# EAGLE board ESPixel (EAGLE 7.2.0)
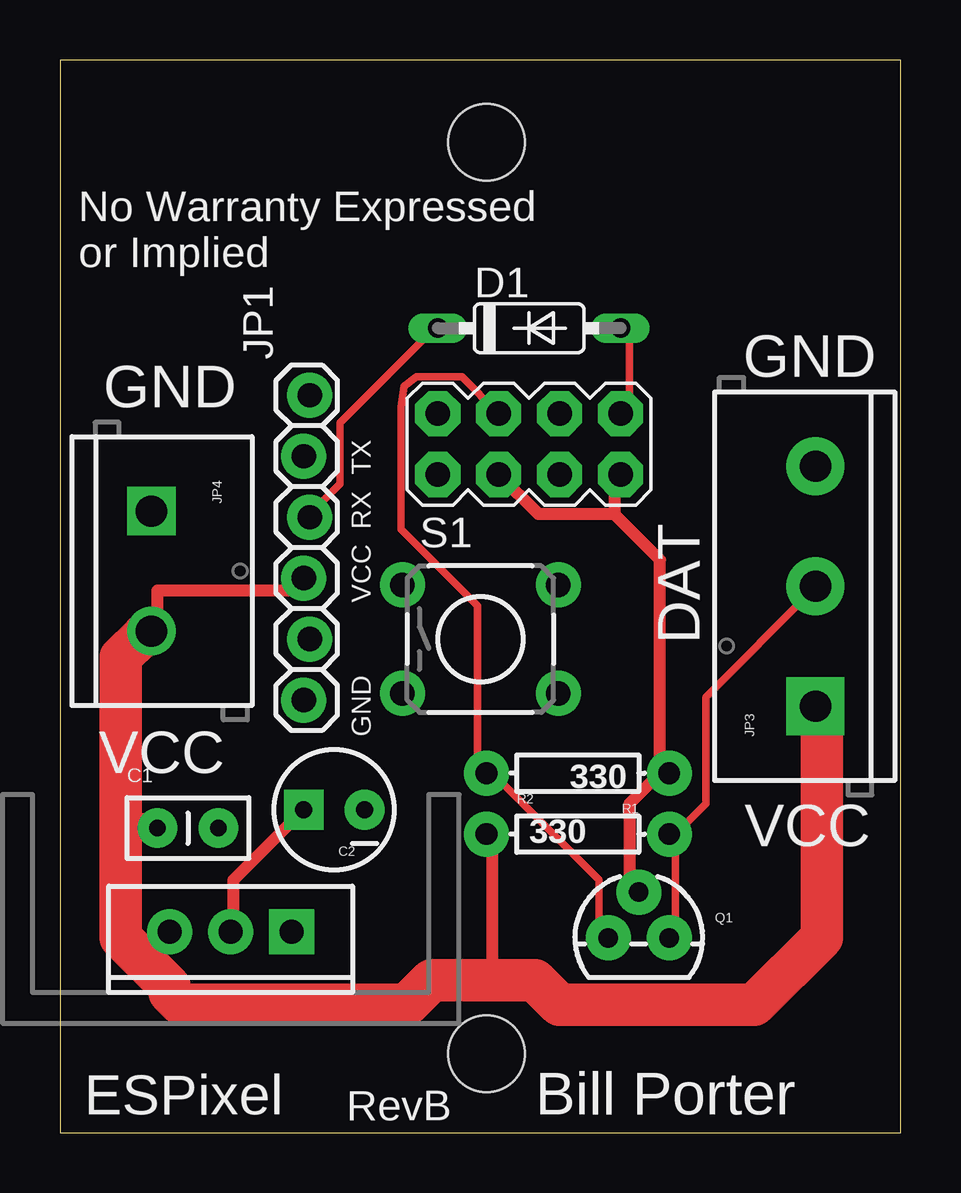
[diagram p0: board, top side]
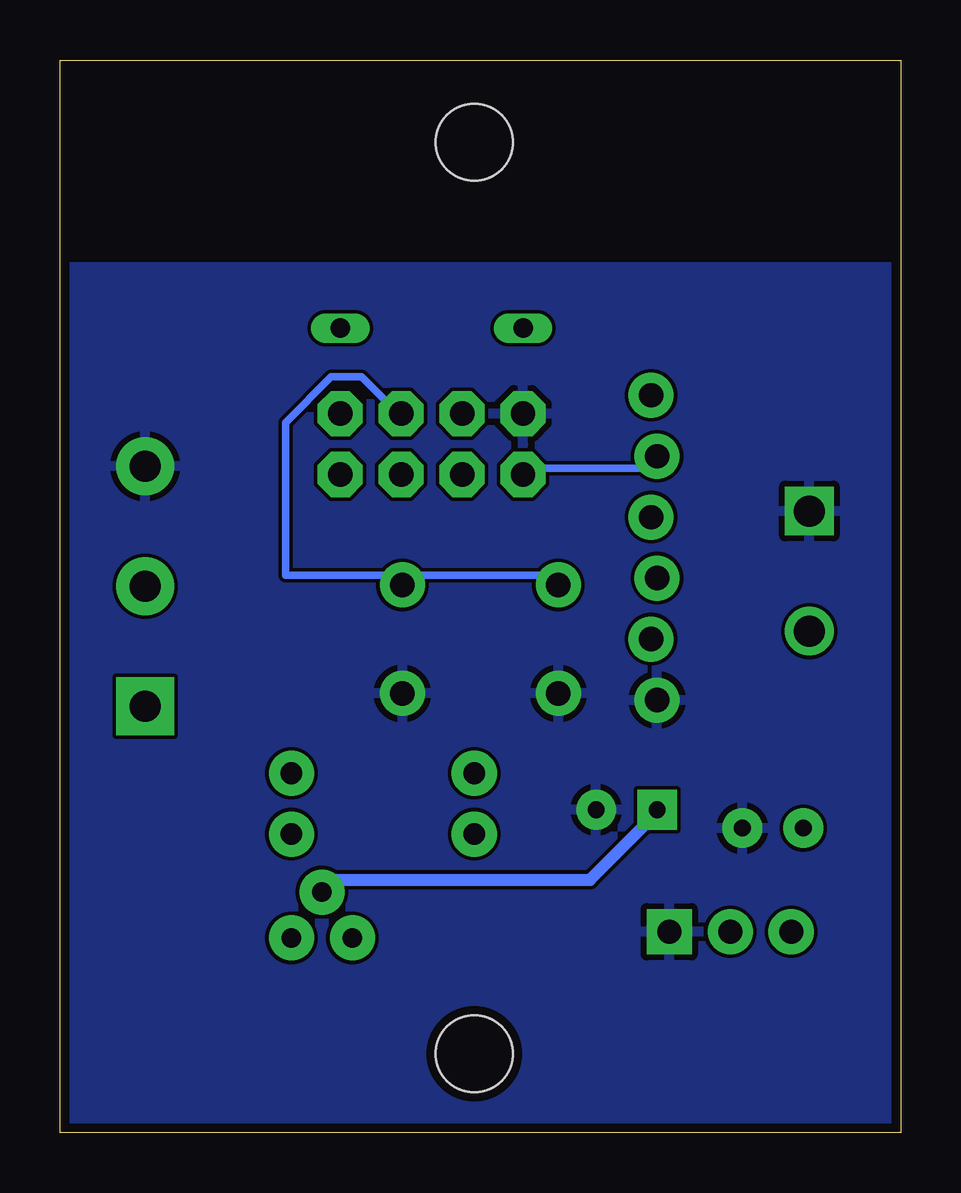
[diagram p1: board, bottom side, seen from below]

Size 35.05 x 44.7 mm. Coordinates in mm from the lower left corner, seen from the top.
Outline: 35.05,0 35.05,44.7 0,44.7 0,0 35.05,0
Copper layers (1*16): Top 0.0356mm / dielectric 1.5011mm / Bottom 0.0356mm
Design rules "LaenPCBOrder": minimum track width 6mil, minimum drill 13mil, track to track 6mil, track to pad 6mil, pad to pad 6mil, via to via 6mil, smd to smd 6mil, copper to edge 15mil, drill to drill 6mil, minimum pad ring 7mil, minimum via ring 7mil, stop-mask expansion 3mil, vias tented up to drill 0mil, thermal gap 10mil
Net classes: 0 default: width 0.305 mm; 1 PWR: width 0.508 mm
Holes 3.2 mm at 17.78,41.27 17.78,3.3

## Footprints (pad centres in the part's own frame; a part is rotated, then mirrored left to right if it is on the bottom)
CAP-PTH-SMALLEZ = drill 0.7 pad 1.651: 1 0,0; 2 2.54,0
CPOL-RADIAL-10UF-25V = drill 0.7 pad 1.651 square: 1 1.27,0 | drill 0.7 pad 1.651: 2 -1.27,0
DO35-7 = drill 0.813 long: A 3.81,0; C -3.81,0
1X06_LOCK = drill 1.016 pad 1.88: 1 0,0; 2 2.54,-0.254; 3 5.08,0; 4 7.62,-0.254; 5 10.16,0; 6 12.7,-0.254
SCREWTERMINAL-5MM-3 = drill 1.3 pad 2.413 square: 1 0,0 | drill 1.3 pad 2.413: 2 5,0; 3 10,0
SCREWTERMINAL-5MM-2 = drill 1.3 pad 2.032 square: 1 0,0 | drill 1.3 pad 2.032: 2 5,0
TO-92 = drill 0.813 pad 1.88: 1 -1.27,0; 2 0,1.905; 3 1.27,0
AXIAL-0.3EZ = drill 0.9 pad 1.88: P$1 -3.81,0; P$2 3.81,0
TACTILE-PTH = drill 1.016 pad 1.88: 1 -3.251,2.261; 2 3.251,2.261; 3 -3.251,-2.261; 4 3.251,-2.261
2X4 = drill 1.016 pad 1.88 octagon: 1 -3.81,-1.27; 2 -3.81,1.27; 3 -1.27,-1.27; 4 -1.27,1.27; 5 1.27,-1.27; 6 1.27,1.27; 7 3.81,-1.27; 8 3.81,1.27
TO220-ADJ = drill 1 pad 1.88 square: ADJ -2.54,0 | drill 1 pad 1.88: IN 2.54,0; OUT 0,0

## Placement (x,y rotation side)
C1  [CAP-PTH-SMALLEZ]  4.06,12.7 0 top
C2  [CPOL-RADIAL-10UF-25V]  11.43,13.46 180 top
D1  1N4148DO35-7  [DO35-7]  19.56,33.53 0 top
JP1  [1X06_LOCK]  10.41,30.73 270 top
JP3  [SCREWTERMINAL-5MM-3]  31.5,17.78 90 top
JP4  M025MM  [SCREWTERMINAL-5MM-2]  3.81,25.91 270 top
Q1  MOSFET-NCHANNEL2N7000  [TO-92]  24.13,8.13 0 top
R1  330  [AXIAL-0.3EZ]  21.59,14.99 180 top
R2  330  [AXIAL-0.3EZ]  21.59,12.45 0 top
S1  [TACTILE-PTH]  17.53,20.57 0 top
U$2  M04X2  [2X4]  19.56,28.7 0 top
U$3  V_REG_317SINK  [TO220-ADJ]  7.11,8.38 180 top

## Library data of the parts
C1 C2 = SparkFun-Capacitors
D1 = diode
JP1 U$2 = SparkFun-Connectors
JP3 = SparkFun-Connectors; STOREFRONT_ID: PRT-08433
JP4 = SparkFun-Connectors; STOREFRONT_ID: PRT-08432
Q1 = SparkFun-DiscreteSemi
R1 R2 = SparkFun-Resistors
S1 = SparkFun-Retired
U$3 = SparkFun-PowerIC

## Nets
3.3V [PWR]: C2.1 Q1.2 R1.P$1 U$2.3 U$2.7 U$3.OUT
5V [PWR]: C1.1 JP1.4 JP3.1 JP4.2 R2.P$1 U$3.IN
GND: C1.2 C2.2 JP1.6 JP3.3 JP4.1 S1.3 S1.4 U$2.2 U$3.ADJ
N$1: JP1.2 U$2.1
N$3: U$2.5
N$4: JP3.2 Q1.3 R2.P$2
N$6: Q1.1 R1.P$2 U$2.4
N$7: S1.1 S1.2 U$2.6
N$8: D1.C JP1.3
N$9: D1.A U$2.8

## Tracks (layer width: path | path; a pad name or v marks a point on that pad's centre or on a via)
3.3V
  Top 0.508: C2.1 7.24,10.54 7.24,8.64 U$3.OUT | U$2.3 19.94,25.78 23.11,25.78 | 23.11,25.78 23.11,27.05 U$2.7 | 25.02,14.99 23.75,13.72 23.75,10.54 Q1.2 | 23.11,25.78 25.02,23.88 25.02,14.99 | 25.02,14.99 R1.P$1
  Bottom 0.508: C2.1 10.41,13.08 12.95,10.54 23.75,10.54 Q1.2
5V
  Top 0.508: 2.54,13.08 4.06,13.08 C1.1 | 3.43,20.7 JP4.2 4.06,21.34 4.06,22.61 9.78,22.61 JP1.4 | U$3.IN 4.06,8 3.43,8 3.05,7.62 | 18.03,6.35 18.03,12.45 R2.P$1
  Top 1.778: 3.81,20.83 3.56,20.83 3.43,20.7 2.54,19.81 2.54,13.08 2.54,8.13 3.05,7.62 4.57,6.1 4.57,5.84 5.08,5.33 14.48,5.33 15.49,6.35 18.03,6.35 19.81,6.35 20.83,5.33 28.96,5.33 31.75,8.13 31.75,17.53 JP3.1
GND
  pour Bottom: -3.56,36.07 36.07,36.07 36.07,-0.25 -4.06,-0.51
N$1
  Bottom 0.305: JP1.2 10.41,27.69 15.49,27.69 U$2.1
N$4
  Top 0.305: 25.65,12.45 25.65,8.64 Q1.3 | 25.65,12.45 26.92,13.72 26.92,18.16 31.37,22.61 JP3.2 | 25.65,12.45 R2.P$2
N$6
  Top 0.305: Q1.1 22.48,8.64 22.48,10.54 18.03,14.99 R1.P$2 17.4,14.99 17.4,21.97 14.22,25.15 14.22,30.23 14.35,31.12 14.86,31.5 16.76,31.5 U$2.4
N$7
  Bottom 0.305: S1.1 14.86,23.24 20.57,23.24 S1.2 21.21,23.24 25.65,23.24 25.65,29.59 23.75,31.5 22.48,31.5 21.21,30.23 U$2.6
N$8
  Top 0.305: D1.C 15.49,33.4 11.68,29.59 11.68,27.05 10.41,25.78 JP1.3
N$9
  Top 0.305: D1.A 23.75,33.4 23.75,30.23 U$2.8

## Text on the board
tNames: No Warranty Expressed / or Implied | GND | GND | TX | RX | DAT | VCC | VCC | GND | VCC | ESPixel | RevB | Bill Porter